# Altium PCB Breakout_Board.PcbDoc
Units mil, origin at the board's own origin, x right, y up, seen from the top; angles counter-clockwise.
Board outline 3000 x 2000 mil, 2 copper layers (Top Layer, Bottom Layer); 6 components, 8 nets, 27 pads, 0 vias.
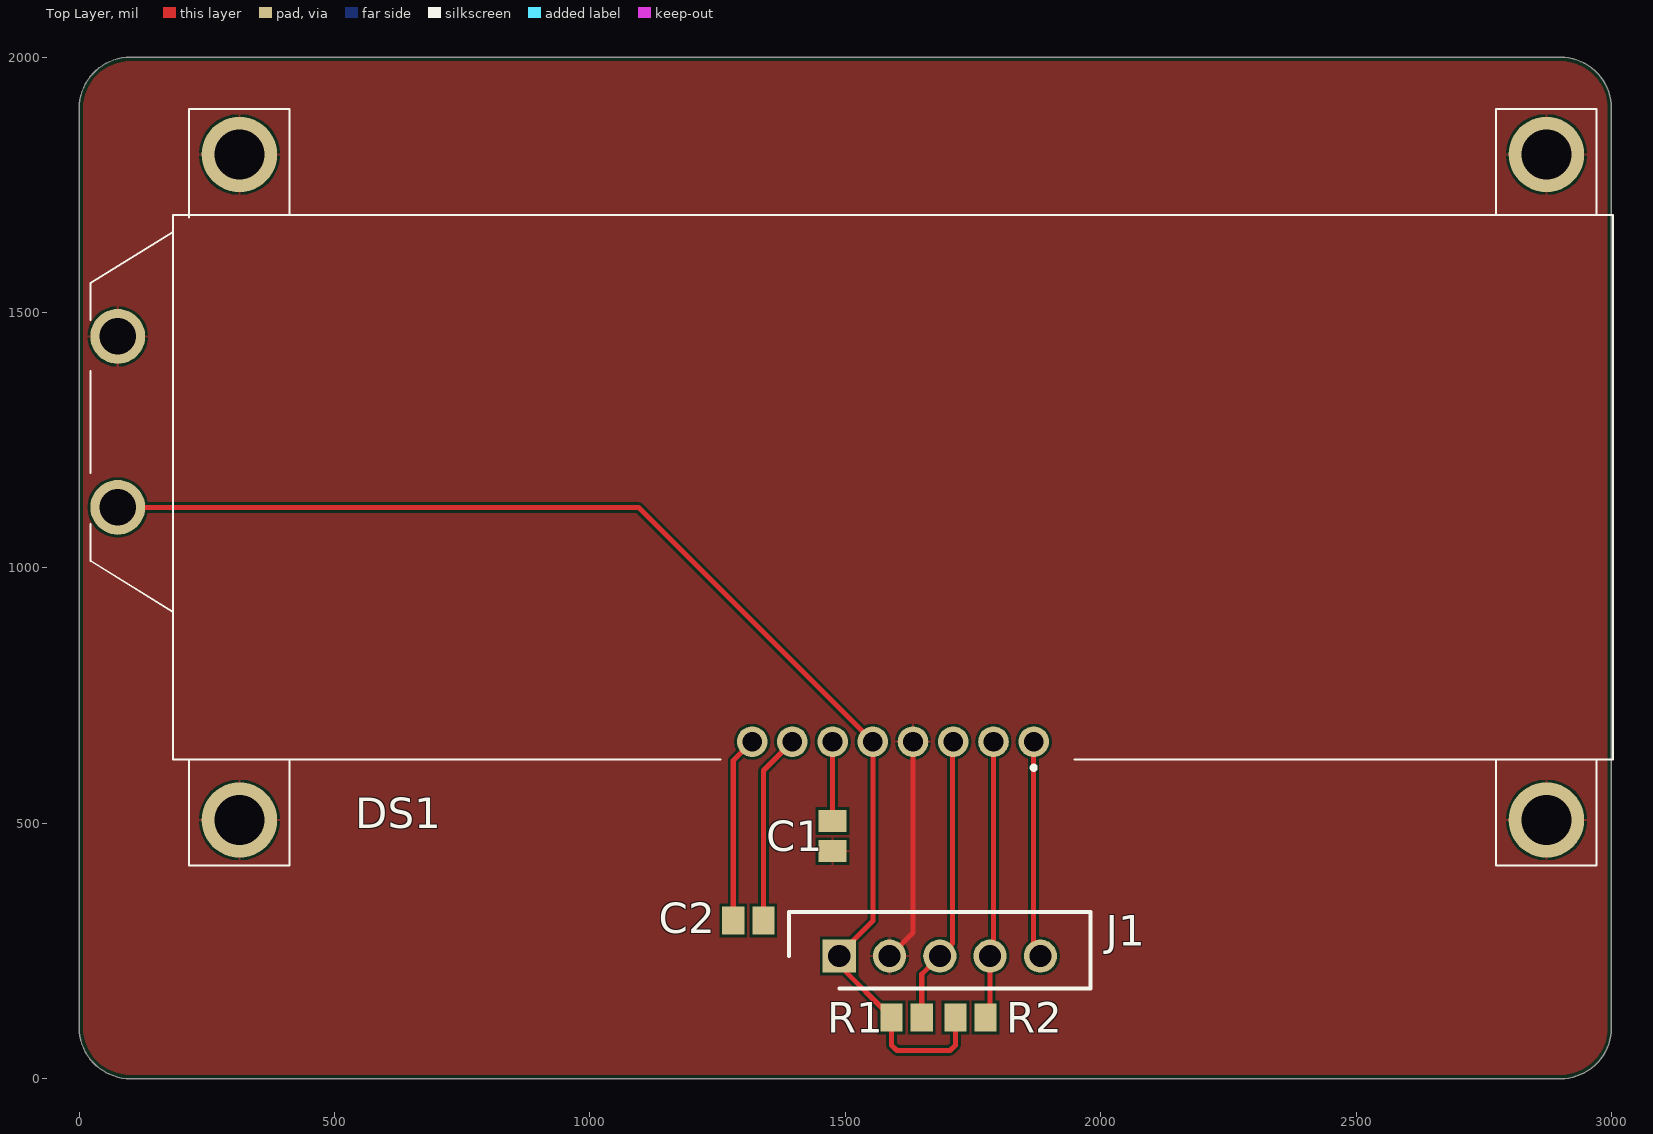
[diagram p0: Top Layer view]
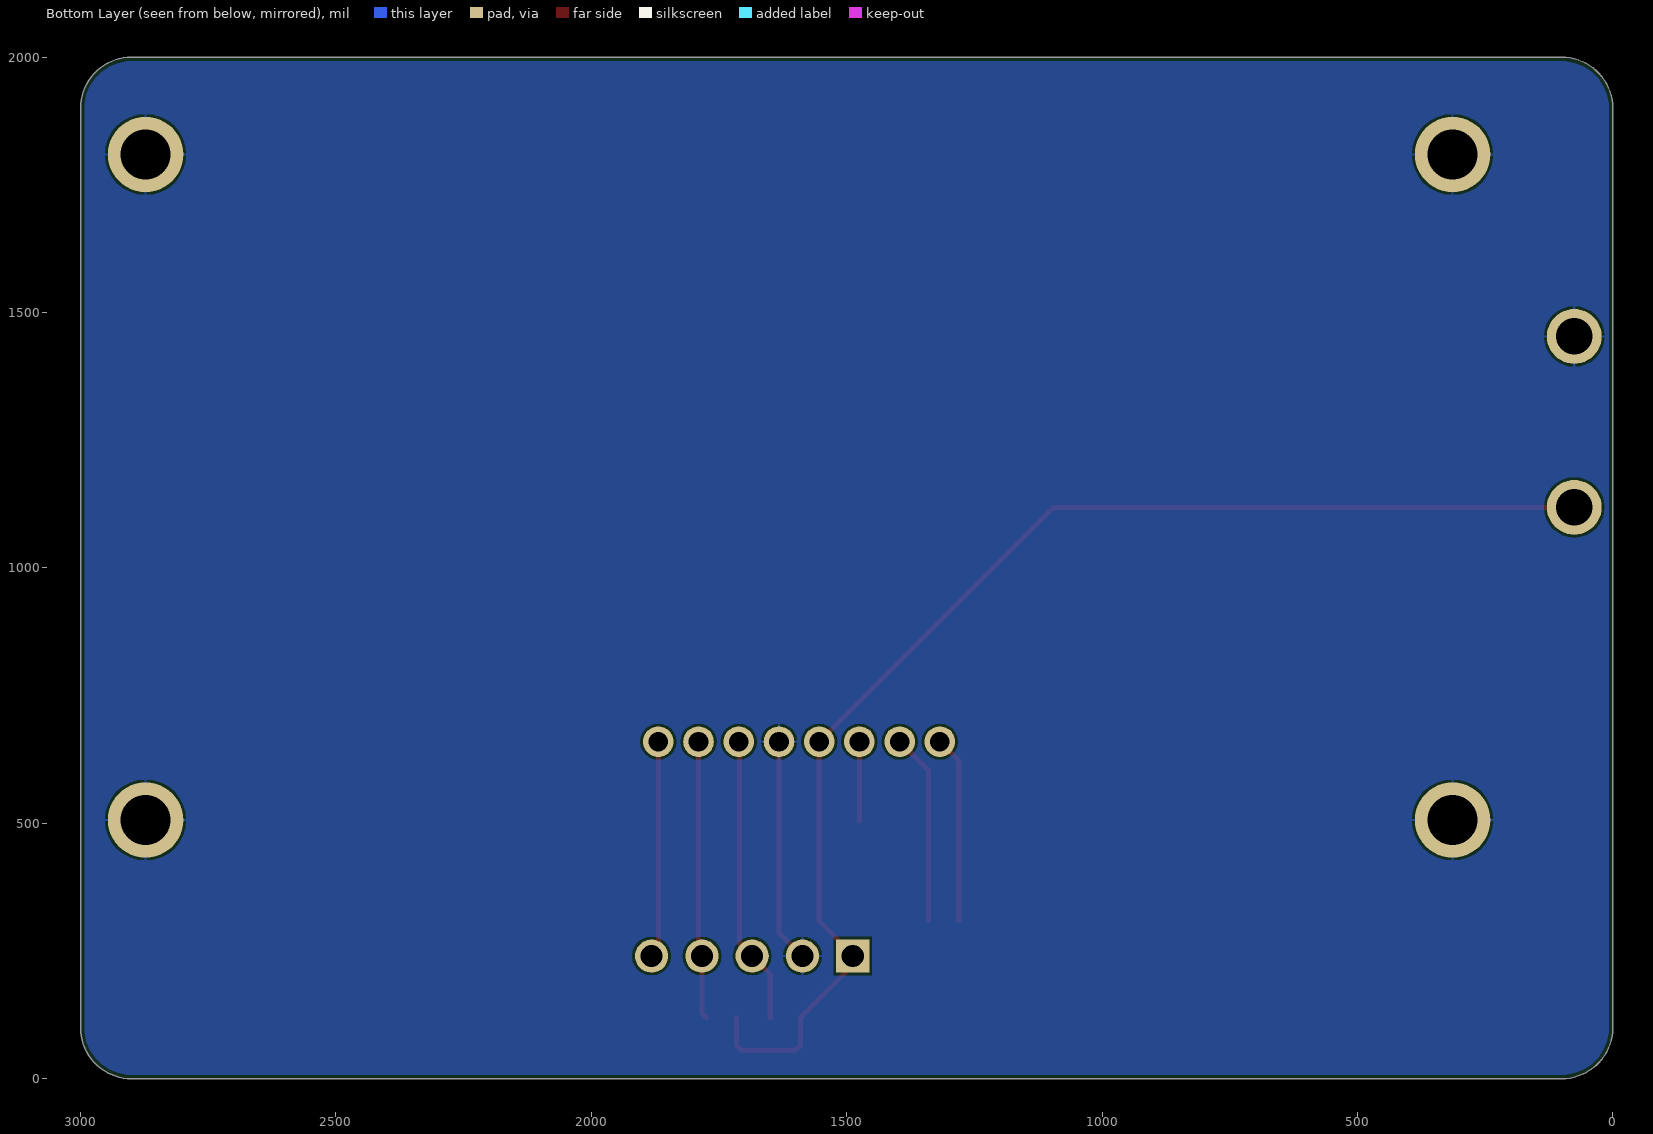
[diagram p1: Bottom Layer view, seen from below]

## Layer stack, top to bottom
Top Solder: solder mask 0.4, Solder Resist, Dk 3.5
Top Layer: signal copper 1.4
Dielectric 1: dielectric 12.6, FR-4, Dk 4.8
Bottom Layer: signal copper 1.4
Bottom Solder: solder mask 0.4, Solder Resist, Dk 3.5

## Board outline
100,0 cw(c100,100) 0,100 0,1900 cw(c100,1900) 100,2000 2900,2000 cw(c2900,1900) 3000,1900 3000,100 cw(c2900,100) 2900,0

## Design rules (kind name [scope] priority, off if disabled: settings)
BoardOutlineClearance [All] p1: gap=7.87 ignorepadtopadclearanceinfootprint=FALSE
Clearance [All] p1: gap=5 ignorepadtopadclearanceinfootprint=FALSE except(9.84: Arc-Hole Track-Hole SMDPad-Hole THPad-Hole Via-Hole Fill-Hole Poly-Hole Region-Hole Text-Hole)
ComponentClearance [All] p1: gap=5 collisioncheckmode=3 verticalgap=5 showdistances=TRUE
DiffPairsRouting [All] p1: maxlimit=10 minlimit=5 mostfreqgap=5 toplayer_minwidth=5 toplayer_maxwidth=1000 toplayer_prefwidth=5 bottomlayer_minwidth=5 bottomlayer_maxwidth=1000 bottomlayer_prefwidth=5 maxuncoupledlength=500
Height [All] p1: minheight=0 maxheight=71497.94 prefheight=500
HoleSize [All] p1: absolutevalues=TRUE maxlimit=248.03 minlimit=11.81 maxpercent=80.000 minpercent=20.000
HoleToHoleClearance [All] p1: gap=9.84 allowstackedmicrovias=FALSE
MinimumAnnularRing [All] p1: minimumring=3
MinimumSolderMaskSliver [All] p1: minsoldermaskwidth=0
PlaneClearance [All] p1: clearance=5
PlaneConnect PlaneConnectPowerPads [InPadClass('PowerPads')] p1: planeconnectstyle=Direct reliefexpansion=20 reliefentries=4 reliefconductorwidth=10 reliefairgap=10
PlaneConnect [All] p2: pad.planeconnectstyle=Relief pad.reliefexpansion=11.81 pad.reliefentries=4 pad.reliefconductorwidth=5 pad.reliefairgap=5 via.planeconnectstyle=Direct via.reliefexpansion=11.81 via.reliefentries=4 via.reliefconductorwidth=5 via.reliefairgap=5
PolygonConnect PolygonConnectPowerPads [All vs (InPadClass('PowerPads'))] p1: connectstyle=Direct reliefconductorwidth=10 reliefentries=4 polygonreliefangle="90 Angle" airgapwidth=10
PolygonConnect [All] p2: thpad.connectstyle=Relief thpad.reliefconductorwidth=5 thpad.reliefentries=4 thpad.polygonreliefangle="90 Angle" thpad.airgapwidth=5 smdpad.connectstyle=Relief smdpad.reliefconductorwidth=5 smdpad.reliefentries=4 smdpad.polygonreliefangle="90 Angle" smdpad.airgapwidth=5 via.connectstyle=Direct via.reliefconductorwidth=5 via.reliefentries=4 via.polygonreliefangle="90 Angle" via.airgapwidth=5
RoutingVias [All] p1: holewidth=11.81 width=23.62 viastyle="Through Hole" minholewidth=11.81 minwidth=23.62 maxholewidth=23.62 maxwidth=259.84
SilkToSilkClearance [All] p1: silktosilkclearance=0
SilkToSolderMaskClearance [IsPad] p1: minsilkscreentomaskgap=5 clearancetoexposedcopper=TRUE
SolderMaskExpansion [All] p1: expansion=2.95 istentingtop=FALSE
Width [All] p1: maxlimit=1000 minlimit=5 preferedwidth=5 minimp=50.000000 maximp=50.000000 favimp=50.000000
20 further rules are at their usual default settings.

## Components (designator, comment, footprint, x,y, rotation, side; value= is the part's Value field where it differs from the comment)
C1 "Cap" C0805 1475,475 r90 top value=1uF
C2 "Cap" C0805 1310,310 r180 top value=1uF
DS1 "NHD-C0220BIZ-FSW-FBW-3V3M" NHDC0220BIZFSWFBW3V3M 1512.13,1158.03 r0 top
J1 "B5B-EH" SHDR5W64P0X250_1X5_1500X380X600P 1488.15,240 r0 top
R1 "Res2" C0805 1620,120 r180 top value=4.7k
R2 "Res2" C0805 1745,120 r180 top value=4.7k

## Footprints (in the part's own frame and the unit in brackets; to place one, negate y for a bottom-side part, rotate by r counter-clockwise, add the part's x,y. Pads: shape width x height; smd on the part's side, far side on the other; paste and mask are expansions set on the pad)
C0805 [mm] "Chip Capacitor, Body 2.0x1.3mm, IPC High Density"
  rect 1.1x1.4 smd: 1(-0.75,0) 2(0.75,0)
  body extent -1.1,-0.72 1.1,0.72, height 1.4
NHDC0220BIZFSWFBW3V3M [mm]
  round 1.524 hole 0.98: 1(9.058,-12.65) 2(7.058,-12.65) 3(5.058,-12.65) 4(3.058,-12.65) 5(1.058,-12.65) 6(-0.942,-12.65) 7(-2.942,-12.65) 8(-4.942,-12.65)
  round 2.73 hole 1.82: 9(-36.492,-1) 10(-36.492,7.5)
  round 3.75 hole 2.5: MH1(-30.442,-16.55) MH2(34.558,-16.55) MH3(-30.442,16.55) MH4(34.558,16.55)
  silkscreen extent -37.84,-18.8 37.86,18.8
SHDR5W64P0X250_1X5_1500X380X600P [mm]
  rect 1.65x1.65 hole 1.1: 1(0,0)
  round 1.65 hole 1.1: 2(2.5,0) 3(5,0) 4(7.5,0) 5(10,0)
  silkscreen extent -2.5,-1.6 12.5,2.2, body extent -2.5,-1.9 12.5,1.9, height 6

## Part data
C1 C2: "Capacitor", LatestRevisionDate=17-Jul-2002, LatestRevisionNote="Re-released for DXP Platform.", PackageDescription="Radial Cap, Thru-Hole; 2 Leads; 0.3 in Pin Spacing", PackageReference=RAD-0.3, Published=8-Jun-2000, Publisher="Altium Limited"
DS1: "Display", Manufacturer_Name="Newhaven Display", Mouser Part Number=763-C0220BIZ-FSW-FBW, Arrow Part Number=NHD-C0220BIZ-FSW-FBW-3V3M, Datasheet Link=https://componentsearchengine.com/Datasheets/1/NHD-C0220BiZ-FSW-FBW-3V3M.pdf, Height=7mm, Manufacturer_Part_Number=NHD-C0220BIZ-FSW-FBW-3V3M, Mouser Price/Stock=https://www.mouser.com/Search/Refine.aspx?Keyword=763-C0220BIZ-FSW-FBW
J1: "Connector", Manufacturer_Name="JST (JAPAN SOLDERLESS TERMINALS)", Datasheet Link=http://www.jst-mfg.com/product/pdf/eng/eEH.pdf, Height=6mm, Manufacturer_Part_Number=B5B-EH
R1 R2: "Resistor", LatestRevisionDate=17-Jul-2002, LatestRevisionNote="Re-released for DXP Platform.", PackageDescription="Axial Device, Thru-Hole; 2 Leads; 0.4 in Pin Spacing", PackageReference=AXIAL-0.4, Published=8-Jun-2000, Publisher="Altium Limited"

## Nets (pads, with @x,y where several pads share a name; then routed paths per layer and width w, separated by ;. In a path a pad name is that pad's centre, name@x,y a point inside that pad or via, vN(x,y) a via of type N, cw(c..) or ccw(c..) an arc to the next point about the centre after c; other vN are vias at no path point)
+3.3V: DS1.5 DS1.9 J1.1 R1.2 R2.2 | length 2520.6
  Top Layer w10: DS1.9 1095.12,1118.66 DS1.5 1553.78,308.78 1488.15,243.15 J1.1 1488.15,222.32 R1.2 1590.47,65.47 1600.94,55 1705,55 1715.47,65.47 R2.2
GND: C1.1 DS1.4 DS1.10 DS1.MH1 DS1.MH2 DS1.MH3 DS1.MH4 J1.2 | length 461.8
  Top Layer w10: J1.2 1632.52,285.94 DS1.4
  Bottom Layer w10: J1.2 J1.2@1586.57,262.77
LED_RST: DS1.1 J1.5 | length 425.4
  Top Layer w10: DS1.1 1868.74,253.11 J1.5
NetC1_2: C1.2 DS1.6 | length 155.5
  Top Layer w10: C1.2 1475.04,504.57 DS1.6
NetC2_1: C2.1 DS1.7 | length 373.5
  Top Layer w10: C2.1 1339.53,603.23 DS1.7
NetC2_2: C2.2 DS1.8 | length 365.4
  Top Layer w10: C2.2 1280.47,622.91 DS1.8
SCL: DS1.2 J1.4 R2.1 | length 546.4
  Top Layer w10: R2.1 1783.43,128.9 J1.4 1790,246.57 DS1.2
SDA: DS1.3 J1.3 R1.1 | length 565.6
  Top Layer w10: R1.1 1649.53,204.53 J1.3 1710,265 1710,658.74 DS1.3

## Polygon pours and split planes (outlines as drawn)
GND on Top Layer "GND_L01_P000" (solid, pour order 0): 100,0 cw(c100,100) 0,100 0,1900 cw(c100,1900) 100,2000 2900,2000 cw(c2900,1900) 3000,1900 3000,100 cw(c2900,100) 2900,0
GND on Bottom Layer "GND_L02_P001" (solid, pour order 1): 100,0 cw(c100,100) 0,100 0,1900 cw(c100,1900) 100,2000 2900,2000 cw(c2900,1900) 3000,1900 3000,100 cw(c2900,100) 2900,0